# EAGLE board uv_brick (EAGLE 7.2.0)
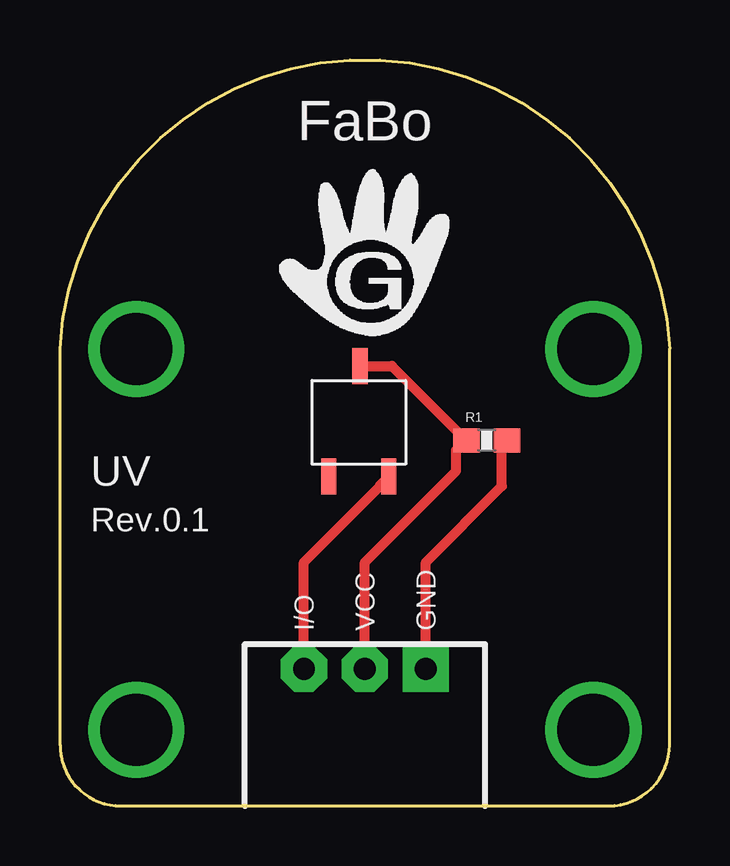
[diagram p0: board, top side]
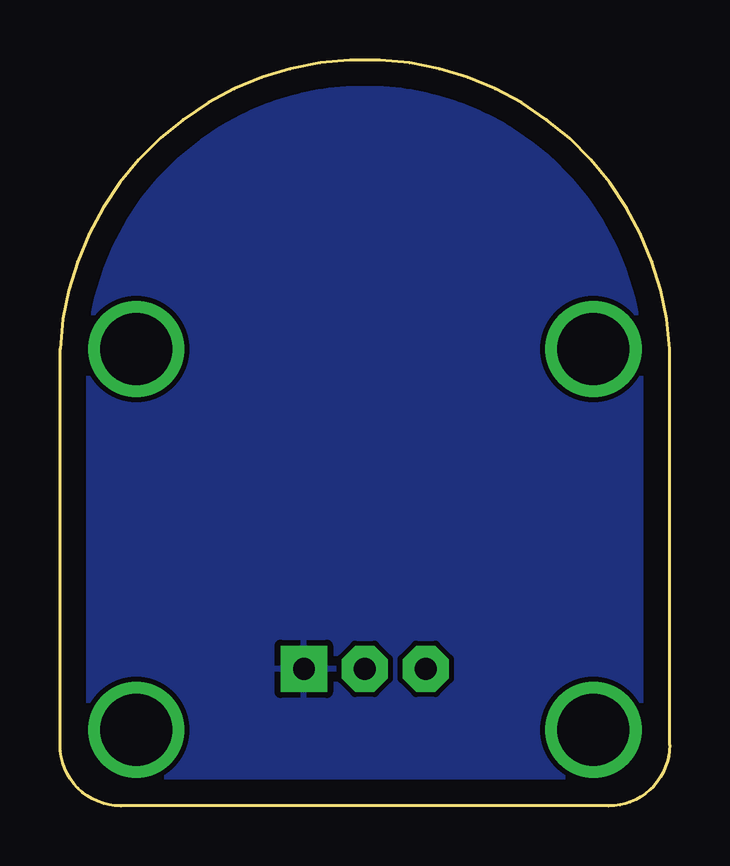
[diagram p1: board, bottom side, seen from below]

Size 25.4 x 31.1 mm. Coordinates in mm from the lower left corner, seen from the top.
Copper layers (1*16): Top 0.035mm / dielectric 1.5mm / Bottom 0.035mm
Design rules "default": minimum track width 10mil, minimum drill 24mil, track to track 8mil, track to pad 8mil, pad to pad 8mil, via to via 8mil, smd to smd 8mil, copper to edge 40mil, drill to drill 8mil, minimum pad ring 10mil, minimum via ring 8mil, stop-mask expansion 4mil, vias tented up to drill 0mil, thermal gap 10mil

## Footprints (pad centres in the part's own frame; a part is rotated, then mirrored left to right if it is on the bottom)
BRICK_3PIN = drill 0.9 pad 1.93 square: GND 2.54,-9.525 | drill 0.9 pad 1.93 octagon: IN/OUT -2.54,-9.525; VCC 0,-9.525 | drill 3 pad 3.81: P$1 -9.525,3.81; P$2 9.525,3.81; P$3 9.525,-12.065; P$4 -9.525,-12.065
0603-RES = smd 1.1 x 1: 1 -0.85,0; 2 0.85,0
GAASP-G6262 = smd 0.635 x 1.5: 1 -1.5,-1.5; 2 1,-1.5; 3 -0.2,3.1

## Placement (x,y rotation side)
J1  BRICK_3PIN  [BRICK_3PIN]  12.7,15.24 0 top
R1  100K  [0603-RES]  17.78,15.24 0 top
U$1  GAASP-G6262  [GAASP-G6262]  12.7,15.24 0 top

## Library data of the parts
J1 U$1 = gclue
R1 = SparkFun

## Nets
GND: J1.GND R1.2
IN_OUT: J1.IN/OUT U$1.2
VCC: J1.VCC R1.1 U$1.3

## Tracks (layer width: path | path; a pad name or v marks a point on that pad's centre or on a via)
GND
  Top 0.406: J1.GND 15.24,10.16 18.41,13.34 18.41,15.03 R1.2
  pour Bottom: -0.64,-0.63 26.04,-0.63 26.04,31.75 -0.64,31.75
IN_OUT
  Top 0.406: J1.IN/OUT 10.16,10.16 13.33,13.34 13.33,13.38 U$1.2
VCC
  Top 0.406: J1.VCC 12.7,10.16 16.51,13.97 16.51,14.82 R1.1 13.83,18.34 U$1.3

## Text on the board
tPlace: UV | Rev.0.1